# EAGLE board mono main Board 4xMaster (EAGLE 7.4.0), part 1 of 2
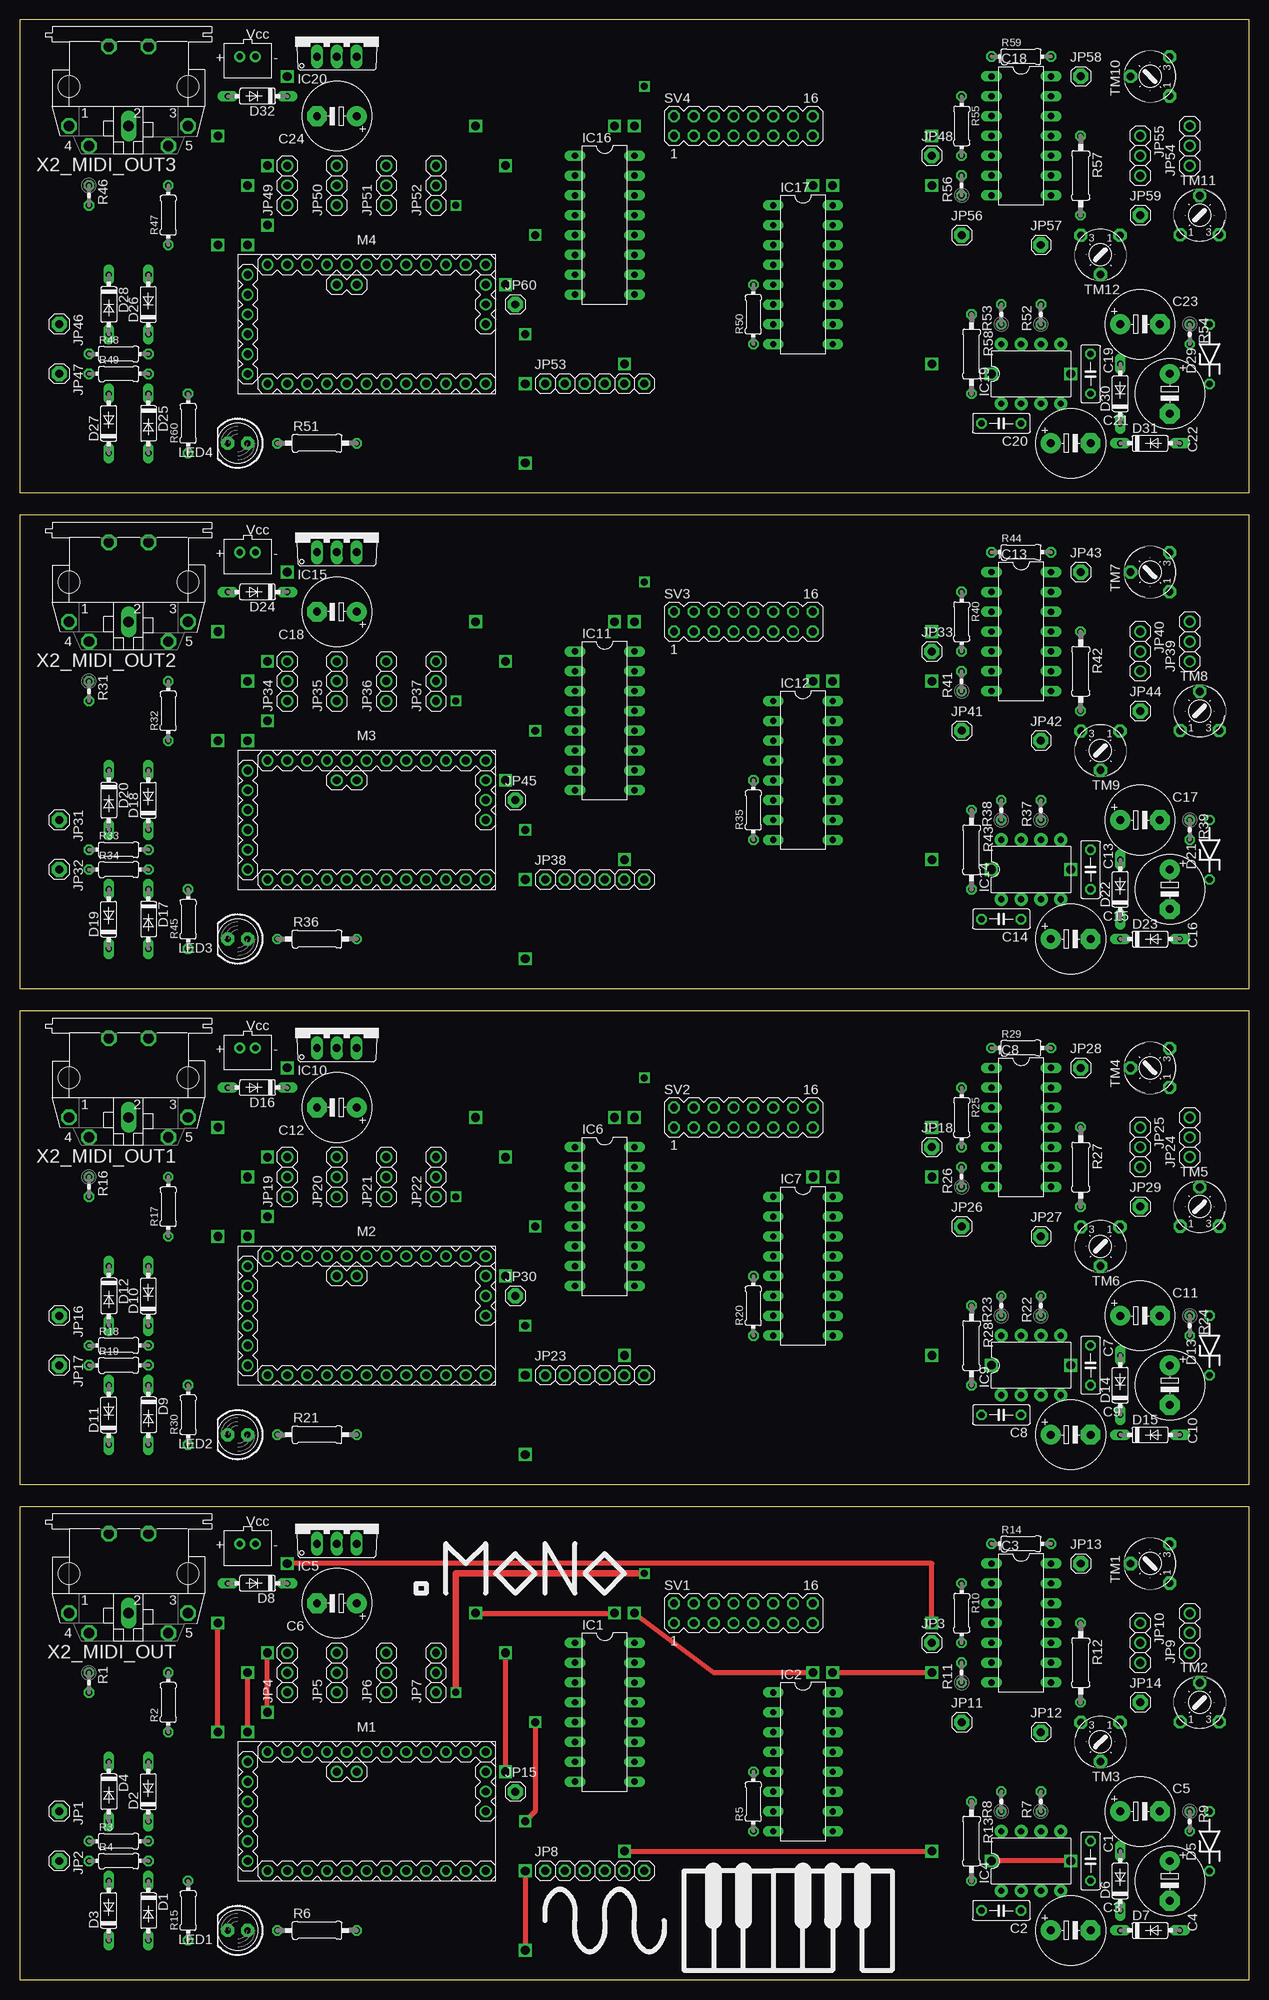
[diagram p0: board, top side]
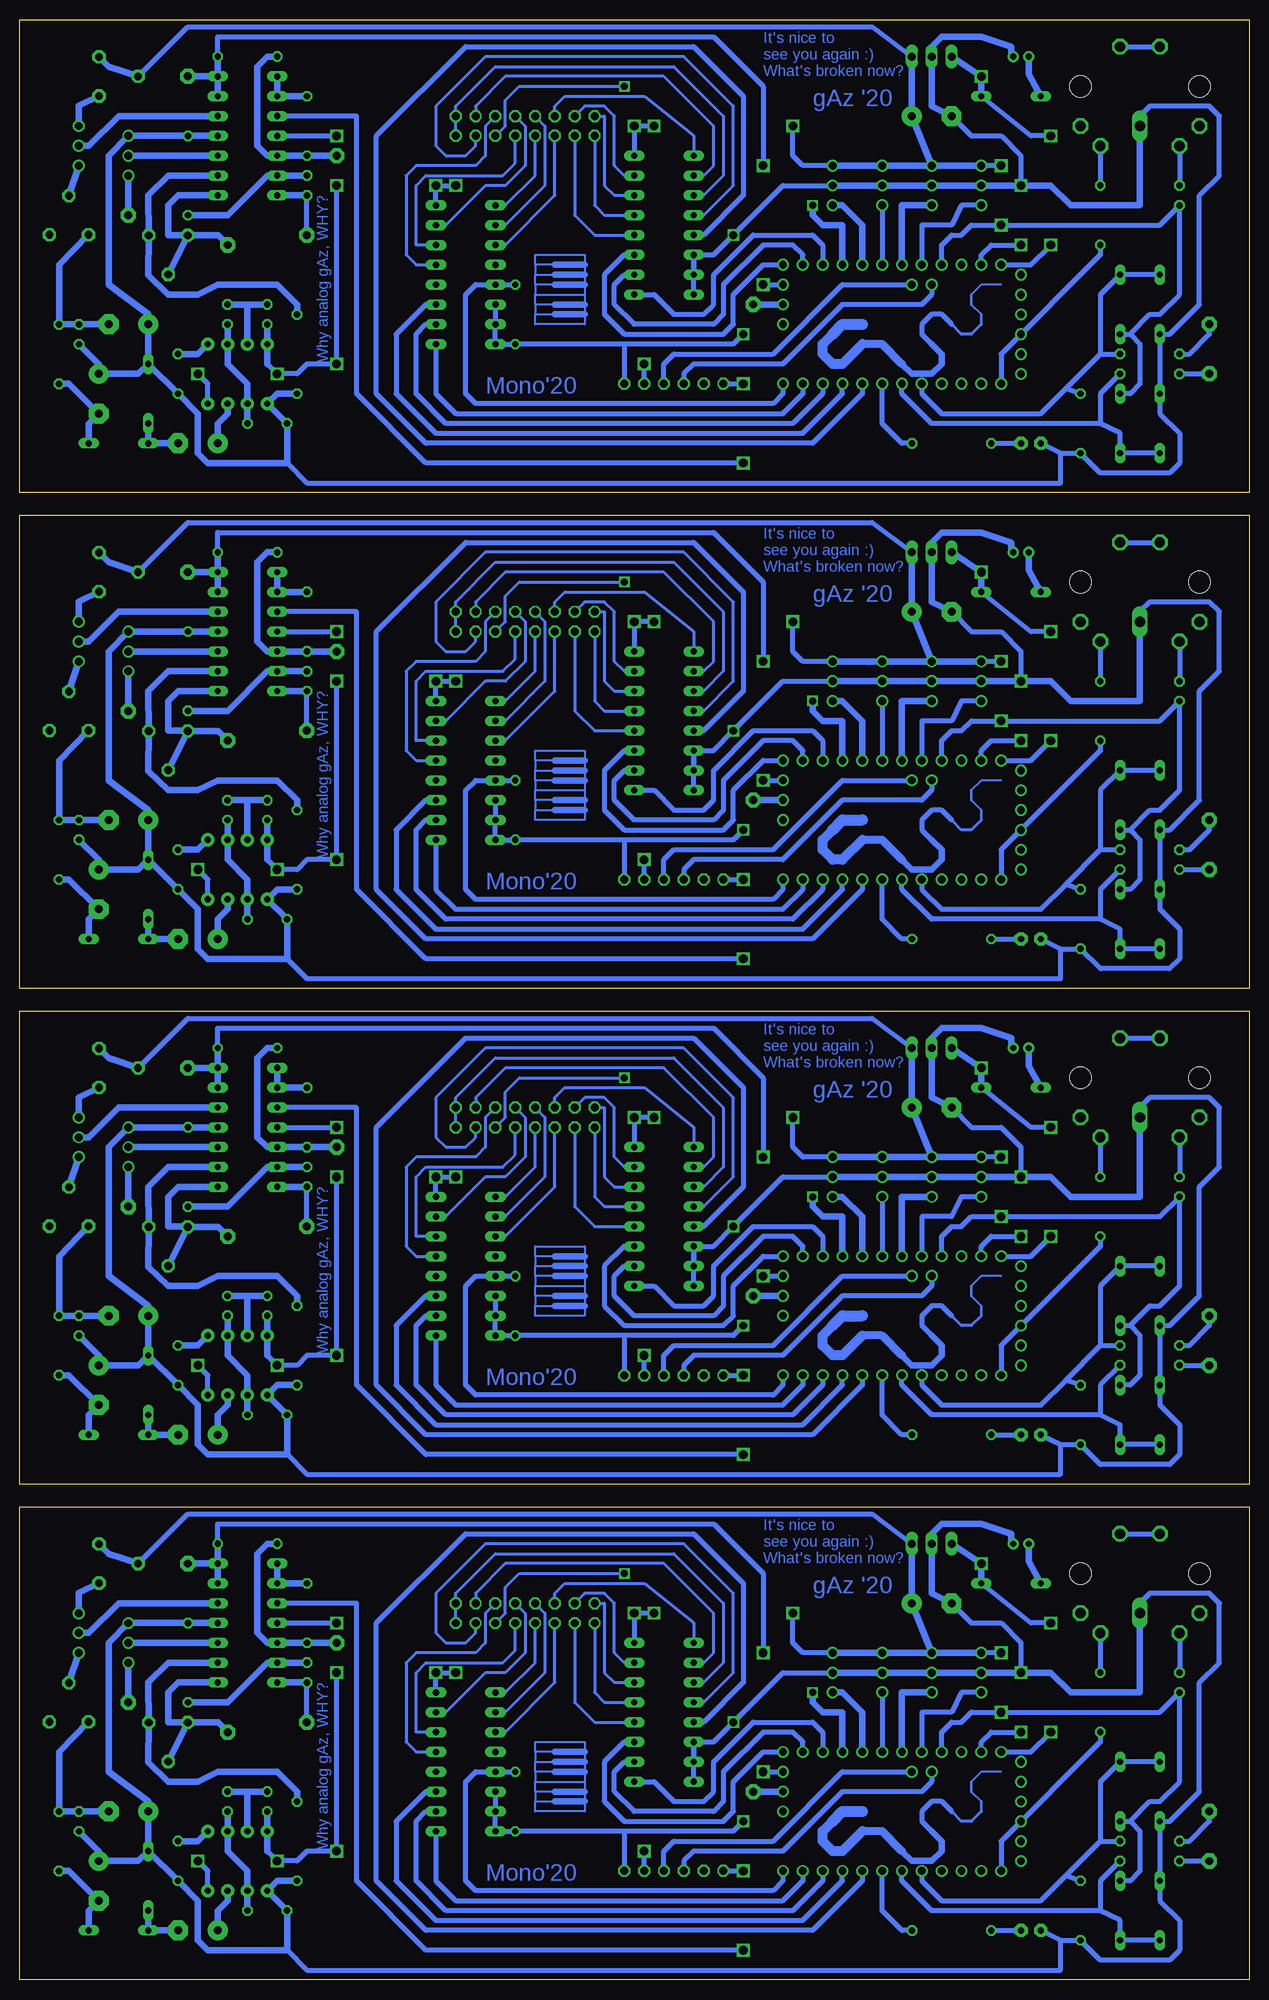
[diagram p1: board, bottom side, seen from below]

Size 157.46 x 251.13 mm. Coordinates in mm from the lower left corner, seen from the top.
Outline: 0,0 157.46,0 157.46,60.63 0,60.63 0,0
Outline: 0,63.5 157.46,63.5 157.46,124.13 0,124.13 0,63.5
Outline: 0,127 157.46,127 157.46,187.63 0,187.63 0,127
Outline: 0,190.5 157.46,190.5 157.46,251.13 0,251.13 0,190.5
Copper layers (1*16): Top 0.035mm / dielectric 1.5mm / Bottom 0.035mm
Design rules "default": minimum track width 10mil, minimum drill 24mil, track to track 8mil, track to pad 8mil, pad to pad 8mil, via to via 8mil, smd to smd 8mil, copper to edge 40mil, drill to drill 8mil, minimum pad ring 10mil, minimum via ring 8mil, stop-mask expansion 4mil, vias tented up to drill 0mil, thermal gap 10mil

## Footprints (pad centres in the part's own frame; a part is rotated, then mirrored left to right if it is on the bottom)
C050-025X075 = drill 0.813 octagon: 1 -2.54,0; 2 2.54,0
E5-8,5 = drill 1.016 pad 2.54: + -2.54,0 | drill 1.016 pad 2.54 octagon: - 2.54,0
JST-PH-2-THM = drill 0.8 pad 1.422: 1 1,0; 2 -1,0
DO35-7 = drill 0.813 long: A 3.81,0; C -3.81,0
ZDIO-7.5 = drill 0.813 octagon: A 3.81,0; C -3.81,0
DIL16 = drill 0.813 long: 1 -8.89,-3.81; 2 -6.35,-3.81; 3 -3.81,-3.81; 4 -1.27,-3.81; 5 1.27,-3.81; 6 3.81,-3.81; 7 6.35,-3.81; 8 8.89,-3.81; 9 8.89,3.81; 10 6.35,3.81; 11 3.81,3.81; 12 1.27,3.81; 13 -1.27,3.81; 14 -3.81,3.81; 15 -6.35,3.81; 16 -8.89,3.81
DIL14 = drill 0.813 long: 1 -7.62,-3.81; 2 -5.08,-3.81; 3 -2.54,-3.81; 4 0,-3.81; 5 2.54,-3.81; 6 5.08,-3.81; 7 7.62,-3.81; 8 7.62,3.81; 9 5.08,3.81; 10 2.54,3.81; 11 0,3.81; 12 -2.54,3.81; 13 -5.08,3.81; 14 -7.62,3.81
DIL08-ROUND = drill 0.813 pad 1.676: 1 -3.81,-3.81; 2 -1.27,-3.81; 3 1.27,-3.81; 4 3.81,-3.81; 5 3.81,3.81; 6 1.27,3.81; 7 -1.27,3.81; 8 -3.81,3.81
TO220V = drill 1.016 long: 1 -2.54,-2.54; 2 0,-2.54; 3 2.54,-2.54
1X01 = drill 1.016 pad 1.93 octagon: 1 0,0
1X03 = drill 1.016: 1 -2.54,0; 2 0,0; 3 2.54,0
1X06 = drill 1.016 octagon: 1 -6.35,0; 2 -3.81,0; 3 -1.27,0; 4 1.27,0; 5 3.81,0; 6 6.35,0
LED5MM = drill 0.813 pad 1.676 octagon: A -1.27,0; K 1.27,0
ARDUINO-PRO-MINI = drill 1: J1.1 -15.24,6.35; J1.2 -15.24,3.81; J1.3 -15.24,1.27; J1.4 -15.24,-1.27; J1.5 -15.24,-3.81; J1.6 -15.24,-6.35; J2.1 -1.27,5.08; J2.2 -3.81,5.08; J3.1 15.24,0; J3.2 15.24,2.54; J3.3 15.24,5.08; J6.1 -12.7,7.62; J6.2 -10.16,7.62; J6.3 -7.62,7.62; J6.4 -5.08,7.62; J6.5 -2.54,7.62; J6.6 0,7.62; J6.7 2.54,7.62; J6.8 5.08,7.62; J6.9 7.62,7.62; J6.10 10.16,7.62; J6.11 12.7,7.62; J6.12 15.24,7.62; J7.1 15.24,-7.62; J7.2 12.7,-7.62; J7.3 10.16,-7.62; J7.4 7.62,-7.62; J7.5 5.08,-7.62; J7.6 2.54,-7.62; J7.7 0,-7.62; J7.8 -2.54,-7.62; J7.9 -5.08,-7.62; J7.10 -7.62,-7.62; J7.11 -10.16,-7.62; J7.12 -12.7,-7.62
0204V = drill 0.813 octagon: 1 -1.27,0; 2 1.27,0
0204/7 = drill 0.813 octagon: 1 -3.81,0; 2 3.81,0
0207/10 = drill 0.813 octagon: 1 -5.08,0; 2 5.08,0
MA08-2 = drill 1.016 octagon: 1 -8.89,-1.27; 2 -8.89,1.27; 3 -6.35,-1.27; 4 -6.35,1.27; 5 -3.81,-1.27; 6 -3.81,1.27; 7 -1.27,-1.27; 8 -1.27,1.27; 9 1.27,-1.27; 10 1.27,1.27; 11 3.81,-1.27; 12 3.81,1.27; 13 6.35,-1.27; 14 6.35,1.27; 15 8.89,-1.27; 16 8.89,1.27
6MM = drill 1 pad 1.676 octagon: A -2.5,-2.5; E 2.5,-2.5; S 0,2.5
MAB5SH = drill 1.321 octagon: 1 7.62,5.08; 3 -7.62,5.08; 4 5.08,7.62; 5 -5.08,7.62; PE -2.54,-5.08; PE@ 2.54,-5.08 | drill 1.321 long: 2 0,5.08 | hole 2.794: 7.62,0; -7.62,0

## Placement (x,y rotation side)
C1  [C050-025X075]  137.16,15.24 270 top
C2  [C050-025X075]  125.73,8.89 180 top
C3  [E5-8,5]  134.62,6.35 0 top
C4  [E5-8,5]  147.32,12.7 270 top
C5  [E5-8,5]  143.51,21.59 0 top
C6  [E5-8,5]  40.64,48.26 180 top
C7  [C050-025X075]  137.16,78.74 270 top
C8  [C050-025X075]  125.73,72.39 180 top
C9  [E5-8,5]  134.62,69.85 0 top
C10  [E5-8,5]  147.32,76.2 270 top
C11  [E5-8,5]  143.51,85.09 0 top
C12  [E5-8,5]  40.64,111.76 180 top
C13  [C050-025X075]  137.16,142.24 270 top
C14  [C050-025X075]  125.73,135.89 180 top
C15  [E5-8,5]  134.62,133.35 0 top
C16  [E5-8,5]  147.32,139.7 270 top
C17  [E5-8,5]  143.51,148.59 0 top
C18  [E5-8,5]  40.64,175.26 180 top
C19  [C050-025X075]  137.16,205.74 270 top
C20  [C050-025X075]  125.73,199.39 180 top
C21  [E5-8,5]  134.62,196.85 0 top
C22  [E5-8,5]  147.32,203.2 270 top
C23  [E5-8,5]  143.51,212.09 0 top
C24  [E5-8,5]  40.64,238.76 180 top
CN1  Vcc  [JST-PH-2-THM]  29.21,55.88 180 top
CN2  Vcc  [JST-PH-2-THM]  29.21,119.38 180 top
CN3  Vcc  [JST-PH-2-THM]  29.21,182.88 180 top
CN4  Vcc  [JST-PH-2-THM]  29.21,246.38 180 top
D1  1N4148  [DO35-7]  16.51,8.89 270 top
D2  1N4148  [DO35-7]  16.51,24.13 90 top
D3  1N4148  [DO35-7]  11.43,8.89 90 top
D4  1N4148  [DO35-7]  11.43,24.13 270 top
D5  [ZDIO-7.5]  152.4,17.78 90 top
D6  4148  [DO35-7]  140.97,12.7 90 top
D7  1N4148  [DO35-7]  144.78,6.35 0 top
D8  4148  [DO35-7]  30.48,50.8 180 top
D9  1N4148  [DO35-7]  16.51,72.39 270 top
D10  1N4148  [DO35-7]  16.51,87.63 90 top
D11  1N4148  [DO35-7]  11.43,72.39 90 top
D12  1N4148  [DO35-7]  11.43,87.63 270 top
D13  [ZDIO-7.5]  152.4,81.28 90 top
D14  4148  [DO35-7]  140.97,76.2 90 top
D15  1N4148  [DO35-7]  144.78,69.85 0 top
D16  4148  [DO35-7]  30.48,114.3 180 top
D17  1N4148  [DO35-7]  16.51,135.89 270 top
D18  1N4148  [DO35-7]  16.51,151.13 90 top
D19  1N4148  [DO35-7]  11.43,135.89 90 top
D20  1N4148  [DO35-7]  11.43,151.13 270 top
D21  [ZDIO-7.5]  152.4,144.78 90 top
D22  4148  [DO35-7]  140.97,139.7 90 top
D23  1N4148  [DO35-7]  144.78,133.35 0 top
D24  4148  [DO35-7]  30.48,177.8 180 top
D25  1N4148  [DO35-7]  16.51,199.39 270 top
D26  1N4148  [DO35-7]  16.51,214.63 90 top
D27  1N4148  [DO35-7]  11.43,199.39 90 top
D28  1N4148  [DO35-7]  11.43,214.63 270 top
D29  [ZDIO-7.5]  152.4,208.28 90 top
D30  4148  [DO35-7]  140.97,203.2 90 top
D31  1N4148  [DO35-7]  144.78,196.85 0 top
D32  4148  [DO35-7]  30.48,241.3 180 top
IC1  74151N  [DIL16]  74.93,34.29 270 top
IC2  74151N  [DIL16]  100.33,27.94 270 top
IC3  LM324N  [DIL14]  128.27,45.72 270 top
IC4  NE555N  [DIL08-ROUND]  129.54,15.24 0 top
IC5  7805  [TO220V]  40.64,58.42 0 top
IC6  74151N  [DIL16]  74.93,97.79 270 top
IC7  74151N  [DIL16]  100.33,91.44 270 top
IC8  LM324N  [DIL14]  128.27,109.22 270 top
IC9  NE555N  [DIL08-ROUND]  129.54,78.74 0 top
IC10  7805  [TO220V]  40.64,121.92 0 top
IC11  74151N  [DIL16]  74.93,161.29 270 top
IC12  74151N  [DIL16]  100.33,154.94 270 top
IC13  LM324N  [DIL14]  128.27,172.72 270 top
IC14  NE555N  [DIL08-ROUND]  129.54,142.24 0 top
IC15  7805  [TO220V]  40.64,185.42 0 top
IC16  74151N  [DIL16]  74.93,224.79 270 top
IC17  74151N  [DIL16]  100.33,218.44 270 top
IC18  LM324N  [DIL14]  128.27,236.22 270 top
IC19  NE555N  [DIL08-ROUND]  129.54,205.74 0 top
IC20  7805  [TO220V]  40.64,248.92 0 top
JP1  CK I/O  [1X01]  5.08,21.59 270 top
JP2  GATE  [1X01]  5.08,15.24 270 top
JP3  CV  [1X01]  116.84,43.18 0 top
JP4  oct_selection  [1X03]  34.29,39.37 90 top
JP5  int_ck_rate  [1X03]  40.64,39.37 90 top
JP6  ck_div  [1X03]  46.99,39.37 90 top
JP7  mode  [1X03]  53.34,39.37 90 top
JP8  [1X06]  73.66,13.97 0 top
JP9  pitch_bend  [1X03]  149.86,44.45 90 top
JP10  expression  [1X03]  143.51,43.18 270 top
JP11  CV_Bend  [1X01]  120.65,33.02 0 top
JP12  Exp_out  [1X01]  130.81,31.75 0 top
JP13  Bend  [1X01]  135.89,53.34 0 top
JP14  Exp_IN  [1X01]  143.51,35.56 0 top
JP15  Seq  [1X01]  63.5,24.13 0 top
JP16  CK I/O  [1X01]  5.08,85.09 270 top
JP17  GATE  [1X01]  5.08,78.74 270 top
JP18  CV  [1X01]  116.84,106.68 0 top
JP19  oct_selection  [1X03]  34.29,102.87 90 top
JP20  int_ck_rate  [1X03]  40.64,102.87 90 top
JP21  ck_div  [1X03]  46.99,102.87 90 top
JP22  mode  [1X03]  53.34,102.87 90 top
JP23  [1X06]  73.66,77.47 0 top
JP24  pitch_bend  [1X03]  149.86,107.95 90 top
JP25  expression  [1X03]  143.51,106.68 270 top
JP26  CV_Bend  [1X01]  120.65,96.52 0 top
JP27  Exp_out  [1X01]  130.81,95.25 0 top
JP28  Bend  [1X01]  135.89,116.84 0 top
JP29  Exp_IN  [1X01]  143.51,99.06 0 top
JP30  Seq  [1X01]  63.5,87.63 0 top
JP31  CK I/O  [1X01]  5.08,148.59 270 top
JP32  GATE  [1X01]  5.08,142.24 270 top
JP33  CV  [1X01]  116.84,170.18 0 top
JP34  oct_selection  [1X03]  34.29,166.37 90 top
JP35  int_ck_rate  [1X03]  40.64,166.37 90 top
JP36  ck_div  [1X03]  46.99,166.37 90 top
JP37  mode  [1X03]  53.34,166.37 90 top
JP38  [1X06]  73.66,140.97 0 top
JP39  pitch_bend  [1X03]  149.86,171.45 90 top
JP40  expression  [1X03]  143.51,170.18 270 top
JP41  CV_Bend  [1X01]  120.65,160.02 0 top
JP42  Exp_out  [1X01]  130.81,158.75 0 top
JP43  Bend  [1X01]  135.89,180.34 0 top
JP44  Exp_IN  [1X01]  143.51,162.56 0 top
JP45  Seq  [1X01]  63.5,151.13 0 top
JP46  CK I/O  [1X01]  5.08,212.09 270 top
JP47  GATE  [1X01]  5.08,205.74 270 top
JP48  CV  [1X01]  116.84,233.68 0 top
JP49  oct_selection  [1X03]  34.29,229.87 90 top
JP50  int_ck_rate  [1X03]  40.64,229.87 90 top
JP51  ck_div  [1X03]  46.99,229.87 90 top
JP52  mode  [1X03]  53.34,229.87 90 top
JP53  [1X06]  73.66,204.47 0 top
JP54  pitch_bend  [1X03]  149.86,234.95 90 top
JP55  expression  [1X03]  143.51,233.68 270 top
JP56  CV_Bend  [1X01]  120.65,223.52 0 top
JP57  Exp_out  [1X01]  130.81,222.25 0 top
JP58  Bend  [1X01]  135.89,243.84 0 top
JP59  Exp_IN  [1X01]  143.51,226.06 0 top
JP60  Seq  [1X01]  63.5,214.63 0 top
LED1  [LED5MM]  27.94,6.35 180 top
LED2  [LED5MM]  27.94,69.85 180 top
LED3  [LED5MM]  27.94,133.35 180 top
LED4  [LED5MM]  27.94,196.85 180 top
M1  ARDUINO-PRO-MINI-5.0V  [ARDUINO-PRO-MINI]  44.45,21.59 0 top
M2  ARDUINO-PRO-MINI-5.0V  [ARDUINO-PRO-MINI]  44.45,85.09 0 top
M3  ARDUINO-PRO-MINI-5.0V  [ARDUINO-PRO-MINI]  44.45,148.59 0 top
M4  ARDUINO-PRO-MINI-5.0V  [ARDUINO-PRO-MINI]  44.45,212.09 0 top
R1  [0204V]  8.89,38.1 270 top
R2  [0204/7]  19.05,35.56 90 top
R3  330  [0204/7]  12.7,17.78 0 top
R4  300  [0204/7]  12.7,15.24 0 top
R5  10k  [0204/7]  93.98,22.86 90 top
R6  330  [0207/10]  38.1,6.35 0 top
R7  10k  [0204V]  130.81,22.86 90 top
R8  10k  [0204V]  125.73,22.86 90 top
R9  220  [0204V]  149.86,20.32 270 top
R10  [0204/7]  120.65,46.99 270 top
R11  10k  [0204V]  120.65,39.37 90 top
R12  10k  [0207/10]  135.89,40.64 270 top
R13  10k  [0207/10]  121.92,17.78 270 top
R14  [0204/7]  128.27,55.88 0 top
R15  1k  [0204/7]  21.59,8.89 90 top
R16  [0204V]  8.89,101.6 270 top
R17  [0204/7]  19.05,99.06 90 top
R18  330  [0204/7]  12.7,81.28 0 top
R19  300  [0204/7]  12.7,78.74 0 top
R20  10k  [0204/7]  93.98,86.36 90 top
R21  330  [0207/10]  38.1,69.85 0 top
R22  10k  [0204V]  130.81,86.36 90 top
R23  10k  [0204V]  125.73,86.36 90 top
R24  220  [0204V]  149.86,83.82 270 top
R25  [0204/7]  120.65,110.49 270 top
R26  10k  [0204V]  120.65,102.87 90 top
R27  10k  [0207/10]  135.89,104.14 270 top
R28  10k  [0207/10]  121.92,81.28 270 top
R29  [0204/7]  128.27,119.38 0 top
R30  1k  [0204/7]  21.59,72.39 90 top
R31  [0204V]  8.89,165.1 270 top
R32  [0204/7]  19.05,162.56 90 top
R33  330  [0204/7]  12.7,144.78 0 top
R34  300  [0204/7]  12.7,142.24 0 top
R35  10k  [0204/7]  93.98,149.86 90 top
R36  330  [0207/10]  38.1,133.35 0 top
R37  10k  [0204V]  130.81,149.86 90 top
R38  10k  [0204V]  125.73,149.86 90 top
R39  220  [0204V]  149.86,147.32 270 top
R40  [0204/7]  120.65,173.99 270 top
R41  10k  [0204V]  120.65,166.37 90 top
R42  10k  [0207/10]  135.89,167.64 270 top
R43  10k  [0207/10]  121.92,144.78 270 top
R44  [0204/7]  128.27,182.88 0 top
R45  1k  [0204/7]  21.59,135.89 90 top
R46  [0204V]  8.89,228.6 270 top
R47  [0204/7]  19.05,226.06 90 top
R48  330  [0204/7]  12.7,208.28 0 top
R49  300  [0204/7]  12.7,205.74 0 top
R50  10k  [0204/7]  93.98,213.36 90 top
R51  330  [0207/10]  38.1,196.85 0 top
R52  10k  [0204V]  130.81,213.36 90 top
R53  10k  [0204V]  125.73,213.36 90 top
R54  220  [0204V]  149.86,210.82 270 top
R55  [0204/7]  120.65,237.49 270 top
R56  10k  [0204V]  120.65,229.87 90 top
R57  10k  [0207/10]  135.89,231.14 270 top
R58  10k  [0207/10]  121.92,208.28 270 top
R59  [0204/7]  128.27,246.38 0 top
R60  1k  [0204/7]  21.59,199.39 90 top
SV1  [MA08-2]  92.71,46.99 0 top
SV2  [MA08-2]  92.71,110.49 0 top
SV3  [MA08-2]  92.71,173.99 0 top
SV4  [MA08-2]  92.71,237.49 0 top
TM1  [6MM]  144.78,53.34 90 top
TM2  [6MM]  151.13,35.56 0 top
TM3  [6MM]  138.43,30.48 180 top
TM4  [6MM]  144.78,116.84 90 top
TM5  [6MM]  151.13,99.06 0 top
TM6  [6MM]  138.43,93.98 180 top
TM7  [6MM]  144.78,180.34 90 top
TM8  [6MM]  151.13,162.56 0 top
TM9  [6MM]  138.43,157.48 180 top
TM10  [6MM]  144.78,243.84 90 top
TM11  [6MM]  151.13,226.06 0 top
TM12  [6MM]  138.43,220.98 180 top
X2_MIDI_OUT  MAB5SH  [MAB5SH]  13.97,52.07 180 top
X2_MIDI_OUT1  MAB5SH  [MAB5SH]  13.97,115.57 180 top
X2_MIDI_OUT2  MAB5SH  [MAB5SH]  13.97,179.07 180 top
X2_MIDI_OUT3  MAB5SH  [MAB5SH]  13.97,242.57 180 top

## Library data of the parts
C1-C24 R1 R2 R5-R9 R11-R13 R16 R17 R20-R24 R26-R28 R31 R32 R35-R39 R41-R43 R46 R47 R50-R54 R56-R58 = rcl
CN1-CN4 IC4 IC9 IC14 IC19 JP1-JP60 LED1-LED4 TM1-TM12 = adafruit
D1-D32 = diode
IC1 IC2 IC6 IC7 IC11 IC12 IC16 IC17 = 74xx-eu
IC3 IC5 IC8 IC10 IC13 IC15 IC18 IC20 = linear
M1-M4 = diy-modules
R3 R4 R10 R14 R15 R18 R19 R25 R29 R30 R33 R34 R40 R44 R45 R48 R49 R55 R59 R60 = eagle-ltspice; SPICEMODEL: NONE; SPICEPREFIX: R
SV1-SV4 = con-lstb; OC_FARNELL: unknown; OC_NEWARK: unknown
X2_MIDI_OUT X2_MIDI_OUT1-X2_MIDI_OUT3 = con-hirschmann; OC_FARNELL: 809883; OC_NEWARK: unknown

## Nets
AGND: C1.2 C2.2 C4.+ C5.+ C6.- CN1.2 D3.A D4.A D6.A IC1.6 IC1.7 IC1.8 IC2.6 IC2.7 IC2.8 IC3.11 IC4.1 IC5.2 JP4.2 JP5.2 JP6.2 JP7.2 JP8.6 JP10.1 LED1.K M1.J6.2 R5.1 R9.2 R12.1 R13.2 R15.1 X2_MIDI_OUT.2
AGND1: C7.2 C8.2 C10.+ C11.+ C12.- CN2.2 D11.A D12.A D14.A IC6.6 IC6.7 IC6.8 IC7.6 IC7.7 IC7.8 IC8.11 IC9.1 IC10.2 JP19.2 JP20.2 JP21.2 JP22.2 JP23.6 JP25.1 LED2.K M2.J6.2 R20.1 R24.2 R27.1 R28.2 R30.1 X2_MIDI_OUT1.2
AGND2: C13.2 C14.2 C16.+ C17.+ C18.- CN3.2 D19.A D20.A D22.A IC11.6 IC11.7 IC11.8 IC12.6 IC12.7 IC12.8 IC13.11 IC14.1 IC15.2 JP34.2 JP35.2 JP36.2 JP37.2 JP38.6 JP40.1 LED3.K M3.J6.2 R35.1 R39.2 R42.1 R43.2 R45.1 X2_MIDI_OUT2.2
AGND3: C19.2 C20.2 C22.+ C23.+ C24.- CN4.2 D27.A D28.A D30.A IC16.6 IC16.7 IC16.8 IC17.6 IC17.7 IC17.8 IC18.11 IC19.1 IC20.2 JP49.2 JP50.2 JP51.2 JP52.2 JP53.6 JP55.1 LED4.K M4.J6.2 R50.1 R54.2 R57.1 R58.2 R60.1 X2_MIDI_OUT3.2
GND.1: M1.J7.9
GND.2: M2.J7.9
GND.3: M3.J7.9
GND.4: M4.J7.9
N$1: IC1.12 SV1.3
N$2: IC1.13 SV1.1
N$3: IC1.14 SV1.2
N$4: IC1.15 SV1.4
N$5: IC1.1 SV1.6
N$6: IC1.4 SV1.13
N$7: IC1.2 SV1.14
N$8: IC1.3 SV1.15
N$9: IC6.11 M2.J6.12
N$10: IC6.10 M2.J6.11
N$11: IC2.13 SV1.12
N$12: IC2.14 SV1.9
N$13: IC2.15 SV1.10
N$14: IC2.1 SV1.7
N$15: IC2.2 SV1.8
N$16: JP1.1 R3.1
N$17: IC1.11 M1.J6.12
N$18: IC1.10 M1.J6.11
N$19: M1.J7.12 R2.1
N$20: IC2.3 SV1.5
N$21: JP8.3 M1.J2.2
N$22: D2.A D4.C M1.J7.8 R3.2 R15.2
N$23: D1.A D3.C M1.J7.7 R4.2
N$24: IC2.5 M1.J7.1 R5.2
N$25: IC1.5 M1.J7.5
N$26: JP6.1 M1.J6.7
N$27: JP5.1 M1.J6.6
N$28: JP2.1 R4.1
N$29: JP8.4 M1.J2.1
N$30: R2.2 X2_MIDI_OUT.5
N$31: R1.1 X2_MIDI_OUT.4
N$32: JP16.1 R18.1
N$33: IC3.9 R13.1 TM3.A
N$34: JP4.1 M1.J6.5
N$35: IC2.9 M1.J7.2
N$36: IC2.10 M1.J7.3
N$37: IC2.11 M1.J7.4
N$38: LED1.A R6.1
N$39: M1.J7.6 R6.2
N$40: IC4.7 R7.2 R8.2
N$41: C2.1 IC4.2 IC4.6 R7.1
N$42: C1.1 IC4.5
N$43: IC3.1 IC3.2 R10.1
N$44: C3.+ IC4.3
N$45: C3.- D6.C D7.C
N$46: C4.- D5.C D7.A
N$47: C5.- D5.A R9.1 TM2.A
N$48: IC3.12 JP9.2
N$49: IC3.13 IC3.14 JP13.1 M1.J3.3 R14.2
N$50: JP9.3 TM1.A
N$51: IC3.10 JP10.2
N$52: IC3.8 JP12.1 TM3.E TM3.S
N$53: CN1.1 D8.A
N$54: JP9.1 TM2.S
N$55: IC3.6 R11.2 R12.2
N$56: IC3.7 JP11.1 R11.1
N$57: D8.C IC3.4 IC5.1 M1.J6.1
N$58: IC1.9 M1.J6.10
N$59: IC3.3 JP8.1
N$60: IC3.5 JP3.1 R10.2 R14.1
N$61: JP10.3 JP14.1
N$62: M1.J6.9 SV1.11
N$63: D10.A D12.C M2.J7.8 R18.2 R30.2
N$64: D9.A D11.C M2.J7.7 R19.2
N$65: IC7.5 M2.J7.1 R20.2
N$66: JP17.1 R19.1
N$67: JP7.1 M1.J6.8
N$68: JP23.3 M2.J2.2
N$69: JP23.4 M2.J2.1
N$70: JP15.1 M1.J3.2
N$73: R17.2 X2_MIDI_OUT1.5
N$74: R16.1 X2_MIDI_OUT1.4
N$75: JP21.1 M2.J6.7
N$76: JP20.1 M2.J6.6
N$77: IC7.9 M2.J7.2
N$78: IC7.10 M2.J7.3
N$79: IC7.11 M2.J7.4
N$80: LED2.A R21.1
N$81: M2.J7.6 R21.2
N$82: C8.1 IC9.2 IC9.6 R22.1
N$83: C7.1 IC9.5
N$84: IC9.7 R22.2 R23.2
N$85: C9.+ IC9.3
N$86: C9.- D14.C D15.C
N$87: C10.- D13.C D15.A
N$88: C11.- D13.A R24.1 TM5.A
N$89: IC8.1 IC8.2 R25.1
N$90: IC8.12 JP24.2
N$91: IC8.13 IC8.14 JP28.1 M2.J3.3 R29.2
N$92: IC8.10 JP25.2
N$93: IC8.8 JP27.1 TM6.E TM6.S
N$94: JP24.1 TM5.S
N$95: JP24.3 TM4.A
N$96: IC8.6 R26.2 R27.2
N$97: IC8.7 JP26.1 R26.1
N$98: IC8.3 JP23.1
N$99: CN2.1 D16.A
N$100: D16.C IC8.4 IC10.1 M2.J6.1
N$101: JP19.1 M2.J6.5
N$102: IC6.9 M2.J6.10
N$103: M2.J7.12 R17.1
N$104: IC8.5 JP18.1 R25.2 R29.1
N$105: JP25.3 JP29.1
N$106: IC8.9 R28.1 TM6.A
N$107: IC6.12 SV2.3
N$108: IC6.13 SV2.1
N$109: IC6.14 SV2.2
N$110: IC6.15 SV2.4
N$111: IC6.1 SV2.6
N$112: IC6.4 SV2.13
N$113: IC6.2 SV2.14
N$114: IC6.3 SV2.15
N$115: IC7.13 SV2.12
N$116: IC7.14 SV2.9
N$117: IC7.15 SV2.10
N$118: IC7.1 SV2.7
N$119: IC7.2 SV2.8
N$120: IC7.3 SV2.5
N$121: M2.J6.9 SV2.11
N$122: JP22.1 M2.J6.8
N$123: IC6.5 M2.J7.5
N$124: JP30.1 M2.J3.2
N$127: IC11.11 M3.J6.12
N$128: IC11.10 M3.J6.11
N$129: JP31.1 R33.1
N$130: D18.A D20.C M3.J7.8 R33.2 R45.2
N$131: D17.A D19.C M3.J7.7 R34.2
N$132: IC12.5 M3.J7.1 R35.2
N$133: JP32.1 R34.1
N$134: JP38.3 M3.J2.2
N$135: JP38.4 M3.J2.1
N$136: R32.2 X2_MIDI_OUT2.5
N$137: R31.1 X2_MIDI_OUT2.4
N$138: JP36.1 M3.J6.7
N$139: JP35.1 M3.J6.6
N$140: IC12.9 M3.J7.2
N$141: IC12.10 M3.J7.3
N$142: IC12.11 M3.J7.4
N$143: LED3.A R36.1
N$144: M3.J7.6 R36.2
N$145: C14.1 IC14.2 IC14.6 R37.1
N$146: C13.1 IC14.5
N$147: IC14.7 R37.2 R38.2
N$148: C15.+ IC14.3
N$149: C15.- D22.C D23.C
N$150: C16.- D21.C D23.A
N$151: C17.- D21.A R39.1 TM8.A
N$152: IC13.1 IC13.2 R40.1
N$153: IC13.12 JP39.2
N$154: IC13.13 IC13.14 JP43.1 M3.J3.3 R44.2
N$155: IC13.10 JP40.2
N$156: IC13.8 JP42.1 TM9.E TM9.S
N$157: JP39.1 TM8.S
N$158: JP39.3 TM7.A
N$159: IC13.6 R41.2 R42.2
N$160: IC13.7 JP41.1 R41.1
N$161: IC13.3 JP38.1
N$162: CN3.1 D24.A
N$163: D24.C IC13.4 IC15.1 M3.J6.1
N$164: JP34.1 M3.J6.5
N$165: IC11.9 M3.J6.10
N$166: M3.J7.12 R32.1
N$167: IC13.5 JP33.1 R40.2 R44.1
N$168: JP40.3 JP44.1
N$169: IC13.9 R43.1 TM9.A
N$170: IC11.12 SV3.3
N$171: IC11.13 SV3.1
N$172: IC11.14 SV3.2
N$173: IC11.15 SV3.4
N$174: IC11.1 SV3.6
N$175: IC11.4 SV3.13
N$176: IC11.2 SV3.14
N$177: IC11.3 SV3.15
N$178: IC12.13 SV3.12
N$179: IC12.14 SV3.9
N$180: IC12.15 SV3.10
N$181: IC12.1 SV3.7
N$182: IC12.2 SV3.8
N$183: IC12.3 SV3.5
N$184: M3.J6.9 SV3.11
N$185: JP37.1 M3.J6.8
N$186: IC11.5 M3.J7.5
N$187: JP45.1 M3.J3.2
N$190: IC16.11 M4.J6.12
N$191: IC16.10 M4.J6.11
N$192: JP46.1 R48.1
N$193: D26.A D28.C M4.J7.8 R48.2 R60.2
N$194: D25.A D27.C M4.J7.7 R49.2
N$195: IC17.5 M4.J7.1 R50.2
N$196: JP47.1 R49.1
N$197: JP53.3 M4.J2.2
N$198: JP53.4 M4.J2.1
N$199: R47.2 X2_MIDI_OUT3.5
N$200: R46.1 X2_MIDI_OUT3.4
N$201: JP51.1 M4.J6.7
N$202: JP50.1 M4.J6.6
N$203: IC17.9 M4.J7.2
N$204: IC17.10 M4.J7.3
N$205: IC17.11 M4.J7.4
N$206: LED4.A R51.1
N$207: M4.J7.6 R51.2
N$208: C20.1 IC19.2 IC19.6 R52.1
N$209: C19.1 IC19.5
N$210: IC19.7 R52.2 R53.2
N$211: C21.+ IC19.3
N$212: C21.- D30.C D31.C
N$213: C22.- D29.C D31.A
N$214: C23.- D29.A R54.1 TM11.A
N$215: IC18.1 IC18.2 R55.1
N$216: IC18.12 JP54.2
N$217: IC18.13 IC18.14 JP58.1 M4.J3.3 R59.2
N$218: IC18.10 JP55.2
N$219: IC18.8 JP57.1 TM12.E TM12.S
N$220: JP54.1 TM11.S
N$221: JP54.3 TM10.A
N$222: IC18.6 R56.2 R57.2
N$223: IC18.7 JP56.1 R56.1
N$224: IC18.3 JP53.1
N$225: CN4.1 D32.A
N$226: D32.C IC18.4 IC20.1 M4.J6.1
N$227: JP49.1 M4.J6.5
N$228: IC16.9 M4.J6.10
N$229: M4.J7.12 R47.1
N$230: IC18.5 JP48.1 R55.2 R59.1
N$231: JP55.3 JP59.1
N$232: IC18.9 R58.1 TM12.A
N$233: IC16.12 SV4.3
N$234: IC16.13 SV4.1
N$235: IC16.14 SV4.2
N$236: IC16.15 SV4.4
N$237: IC16.1 SV4.6
N$238: IC16.4 SV4.13
N$239: IC16.2 SV4.14
N$240: IC16.3 SV4.15
N$241: IC17.13 SV4.12
N$242: IC17.14 SV4.9
N$243: IC17.15 SV4.10
N$244: IC17.1 SV4.7
N$245: IC17.2 SV4.8
N$246: IC17.3 SV4.5
N$247: M4.J6.9 SV4.11
N$248: JP52.1 M4.J6.8
N$249: IC16.5 M4.J7.5
N$250: JP60.1 M4.J3.2
PE: X2_MIDI_OUT.PE X2_MIDI_OUT.PE@
PE1: X2_MIDI_OUT1.PE X2_MIDI_OUT1.PE@
PE2: X2_MIDI_OUT2.PE X2_MIDI_OUT2.PE@
PE3: X2_MIDI_OUT3.PE X2_MIDI_OUT3.PE@
VCC: C6.+ D1.C D2.C IC1.16 IC2.16 IC4.4 IC4.8 IC5.3 JP4.3 JP5.3 JP6.3 JP7.3 JP8.5 M1.J6.4 R1.2 R8.1 TM1.E TM1.S
VCC1: C12.+ D9.C D10.C IC6.16 IC7.16 IC9.4 IC9.8 IC10.3 JP19.3 JP20.3 JP21.3 JP22.3 JP23.5 M2.J6.4 R16.2 R23.1 TM4.E TM4.S
VCC2: C18.+ D17.C D18.C IC11.16 IC12.16 IC14.4 IC14.8 IC15.3 JP34.3 JP35.3 JP36.3 JP37.3 JP38.5 M3.J6.4 R31.2 R38.1 TM7.E TM7.S
VCC3: C24.+ D25.C D26.C IC16.16 IC17.16 IC19.4 IC19.8 IC20.3 JP49.3 JP50.3 JP51.3 JP52.3 JP53.5 M4.J6.4 R46.2 R53.1 TM10.E TM10.S